# Altium PCB Arrow-ESC.PcbDoc (part 2 of 2)
Units mm, origin at the board's own origin, x right, y up, seen from the top; angles counter-clockwise.
Board outline 52 x 37.5 mm, 6 copper layers (Top Layer (SIG), Int1 (GND), Int2 (PWR), Int3 (SIG), Int4 (GND), Bottom Layer (SIG)), stack 1.546 mm thick; 104 components, 70 nets, 376 pads, 567 vias.
Unrouted connection lines stored in the file: 69.
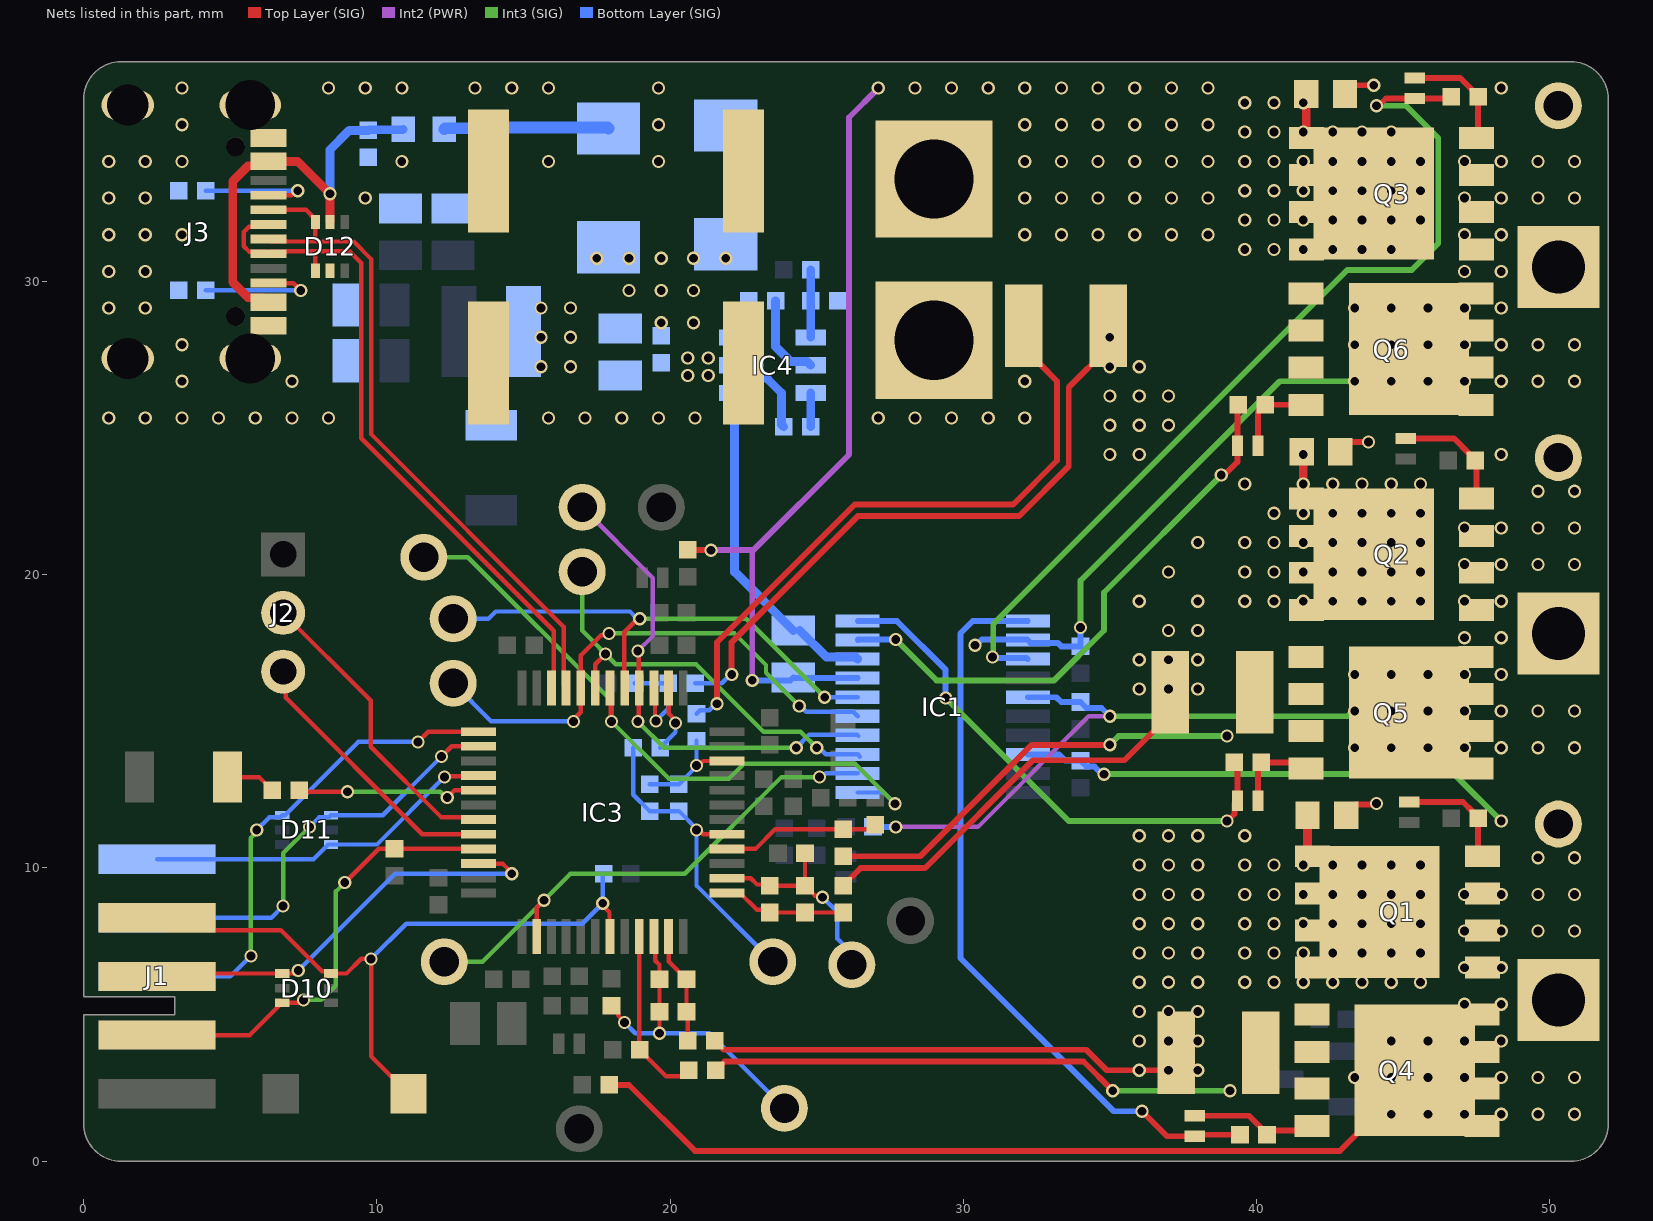
[diagram p6: the nets of this part, all layers, seen from the top]

## Via types
v1: diameter 0.45, hole 0.3, Top Layer (SIG) to Bottom Layer (SIG), tented both sides, 567 vias

## Nets (pads, with @x,y where several pads share a name; then routed paths per layer and width w, separated by ;. In a path a pad name is that pad's centre, name@x,y a point inside that pad or via, vN(x,y) a via of type N, cw(c..) or ccw(c..) an arc to the next point about the centre after c; other vN are vias at no path point) (continued)
GHC: D3.1 IC1.13 R3.1 | length 31.7
  Top Layer (SIG) w0.2: v1(44.1,36) 44.168,36 44.418,36.25 D3.1@45.4,36.25 46.59,36.25 R3.1@46.64,36.3
  Int3 (SIG) w0.2: v1(31,17.2) 31.021,17.221 31.021,18.321 43.1,30.4 45.3,30.4 46.2,31.3 46.2,34.9 45.1,36 v1(44.1,36)
  Bottom Layer (SIG) w0.2: v1(31,17.2) 31.037,17.163 32.162,17.163 IC1.13@32.2,17.125
GLA: D7.1 IC1.11 R10.1 | length 25.7
  Top Layer (SIG) w0.2: v1(36.1,1.7) 36.95,0.85 D7.1@37.9,0.85 ; D7.1@37.9,0.75 38.05,0.75 38.2,0.9 R10.1@39.44,0.9
  Bottom Layer (SIG) w0.2: IC1.11@32.2,18.425 30.325,18.425 29.9,18 29.9,6.928 35.128,1.7 v1(36.1,1.7)
GLB: D8.1 IC1.10 R11.1 | length 18.2
  Top Layer (SIG) w0.2: v1(39,11.6) 39.008,11.6 39.25,11.842 39.25,12.2 D8.1@39.35,12.3 39.35,13.49 R11.1@39.24,13.6
  Int3 (SIG) w0.2: v1(29.4,15.8) 33.6,11.6 v1(39,11.6)
  Bottom Layer (SIG) w0.2: IC1.10@26.4,18.425 27.734,18.425 29.4,16.759 v1(29.4,15.8)
GLC: D9.1 IC1.9 R12.1 | length 19.3
  Top Layer (SIG) w0.2: v1(38.8,23.4) 38.848,23.448 38.948,23.448 39.35,23.85 39.35,25.77 R12.1@39.38,25.8
  Int3 (SIG) w0.2: v1(27.694,17.794) 29.088,16.4 33.1,16.4 34.8,18.1 34.8,19.4 v1(38.8,23.4)
  Bottom Layer (SIG) w0.2: IC1.9@26.4,17.775 26.412,17.787 v1@27.688,17.787
NetC25_2: C25.2 D12.5 FB2.1 J3.A4B9 J3.B4A9 | length 14.3
  Top Layer (SIG) w0.3: J3.B4A9@6.3,29.3 6.15,29.45 5.606,29.45 5.08,29.976 5.08,33.424 5.606,33.95 6.15,33.95 J3.A4B9@6.3,34.1 7.3,34.1 v1(8.4,33) D12.5@8.4,32.034
  Bottom Layer (SIG) w0.3: v1(8.4,33) 8.4,34.5 9.06,35.16 C25.2@9.7,35.16 9.72,35.18 10.88,35.18 FB2.1@10.9,35.2
NetC27_1: C27.1 IC4.2 L1.1 | length 3.2
  Bottom Layer (SIG) w0.3: IC4.2@22.2,27.15 22.293,27.057 22.943,27.057 23.8,26.2 23.8,25.13 C27.1@23.88,25.05
  other v1: 20.6,26.8 21.3,26.8 15.6,27.1 16.6,27.1 20.6,27.4 21.3,27.4 15.6,28.1 16.6,28.1 15.6,29.1 16.6,29.1
NetC27_2: C27.2 IC4.6 | length 1.1
  Bottom Layer (SIG) w0.3: C27.2@24.8,25.05 IC4.6@24.8,26.2
NetC28_2: C28.2 C29.2 D13.1 D14.1 IC4.3 R36.2
  other v1: 19.7,28.6 20.8,28.6 18.6,29.7 19.7,29.7 20.8,29.7 17.5,30.8 18.6,30.8 19.7,30.8 20.8,30.8 21.9,30.8
NetD1_2: D1.2 Q1.4 R1.2 | length 4.1
  Top Layer (SIG) w0.2: D1.2@45.21,12.25 47.044,12.25 47.36,11.934 47.36,11.9 R1.2@47.56,11.7 47.56,10.669 47.77,10.46 47.829,10.4 Q1.4@47.71,10.4
NetD2_2: D2.2 Q2.4 R2.2 | length 4
  Top Layer (SIG) w0.2: D2.2@45.1,24.65 46.744,24.65 47.26,24.134 47.26,24.1 47.51,23.85 Q2.4@47.51,22.6
NetD3_2: D3.2 Q3.4 R3.2 | length 3.9
  Top Layer (SIG) w0.2: D3.2@45.4,36.95 46.944,36.95 47.36,36.534 47.36,36.5 R3.2@47.56,36.3 47.56,34.95 Q3.4@47.51,34.9
NetD7_2: D7.2 Q4.4 R10.2 | length 4.4
  Top Layer (SIG) w0.2: D7.2@37.9,1.55 39.744,1.55 40.16,1.134 40.16,1.1 R10.2@40.36,0.9 40.507,1.047 41.737,1.047 Q4.4@41.89,1.2
NetD8_2: D8.2 Q5.4 R11.2 | length 3
  Top Layer (SIG) w0.2: D8.2@40.05,12.3 40.05,13.49 R11.2@40.16,13.6 41.49,13.6 Q5.4@41.69,13.4
NetD9_2: D9.2 Q6.4 R12.2 | length 2.9
  Top Layer (SIG) w0.2: D9.2@40.05,24.4 40.05,25.55 R12.2@40.3,25.8 Q6.4@41.69,25.8
NetIC4_4: IC4.4 R37.1 R39.2 | length 2.3
  Bottom Layer (SIG) w0.3: IC4.4@24.8,28.1 R39.2@24.8,29.35 R37.1@24.8,30.4
NetIC4_5: IC4.5 R36.1 | length 3
  Bottom Layer (SIG) w0.3: R36.1@23.6,29.35 23.6,27.776 24.076,27.3 24.1,27.3 24.125,27.275 24.675,27.275 IC4.5@24.8,27.15
NetJ3_A5: J3.A5 R34.2 | length 4.2
  Top Layer (SIG) w0.15: J3.A5@6.3,32.95 7.074,32.95 7.224,33.1 v1(7.3,33.1)
  Bottom Layer (SIG) w0.15: R34.2@4.16,33.1 v1(7.3,33.1)
NetJ3_B5: J3.B5 R35.2 | length 4.4
  Top Layer (SIG) w0.15: J3.B5@6.3,29.95 7.145,29.95 7.395,29.7 v1(7.4,29.7)
  Bottom Layer (SIG) w0.15: R35.2@4.16,29.7 v1(7.4,29.7)
NetLED1_2: LED1.2 R28.2 | length 1.7
  Top Layer (SIG) w0.15: LED1.2@4.9,13.1 5.98,13.1 R28.2@6.43,12.65
NetQ4_1: Q4.1 Q4.2 Q4.3 R13.2 R20.1 | length 18.1
  Top Layer (SIG) w0.2: R20.1@21.56,3.1 21.86,3.4 34.1,3.4 v1(35.1,2.4)
  Int3 (SIG) w0.2: v1(35.1,2.4) v1(39.1,2.4)
NetQ5_1: Q5.1 Q5.2 Q5.3 R14.2 R25.1 | length 14.8
  Top Layer (SIG) w0.2: R25.1@25.9,10.4 28.533,10.4 32.333,14.2 v1(35,14.2)
  Int3 (SIG) w0.2: v1(35,14.2) 35.3,14.5 v1(39,14.5)
NetQ6_1: Q6.1 Q6.2 Q6.3 R13.1 R14.1 R15.2 R17.1 R23.1 R31.1 | length 52.7
  Top Layer (SIG) w0.15: R17.1@21.52,4.1 21.82,3.8
  Top Layer (SIG) w0.2: 21.82,3.8 34.195,3.8 34.895,3.1 v1(36,3.1) 36.82,3.1 37.26,3.54 R13.1@37.26,3.7 ; v1(22.1,16.6) 22.1,17.7 26.4,22 31.9,22 33.6,23.7 33.6,26.395 34.94,27.735 R15.2@34.94,28.5 ; R23.1@25.9,9.4 26.5,10 28.7,10 32.375,13.675 35.5,13.675 37,15.175 v1(37,16.1)
  Bottom Layer (SIG) w0.15: R31.1@20.86,16.3 21.764,16.3 22.064,16.6 v1(22.1,16.6)
  other v1: 37,3.1 38,3.1 36,4.1 37,4.1 38,4.1 36,5.1 37,5.1 38,5.1 36,6.1 37,6.1 38,6.1 36,7.1 37,7.1 38,7.1 36,8.1 37,8.1 38,8.1 36,9.1 37,9.1 38,9.1 36,10.1 37,10.1 38,10.1 36,11.1 37,11.1 38,11.1 36,16.1 38,16.1 36,17.1 37,17.1 38,17.1 37,18.1 38,18.1 36,19.1 38,19.1 37,20.1 38,21.1 35,24.1 36,24.1 35,25.1 36,25.1 37,25.1 35,26.1 36,26.1 37,26.1 35,27.1 36,27.1 35,28.1
NRST: C24.2 D10.6 IC3.7 J1.4 S1.2 | length 24.4
  Top Layer (SIG) w0.15: J1.4@2.5,8.3 2.925,7.875 6.725,7.875 8.125,6.475 8.359,6.475 D10.6@8.434,6.4 8.964,6.4 9.464,6.9 v1(9.8,6.9) 9.8,6.843 9.8,3.58 S1.2@11.08,2.3 ; v1(17.7,8.8) 17.7,8.719 17.932,8.487 17.932,7.68 IC3.7@17.95,7.662
  Bottom Layer (SIG) w0.15: v1(9.8,6.9) 11,8.1 17,8.1 v1(17.7,8.8) 17.7,9.76 C24.2@17.74,9.8
OPAMP1_VINM: C14.1 IC3.11 R16.2 R17.2 | length 3.8
  Top Layer (SIG) w0.15: IC3.11@19.95,7.662 19.95,6.81 C14.1@20.56,6.2 ; C14.1@20.56,6.14 R16.2@20.56,5.1 20.6,5.06 R17.2@20.6,4.1
OPAMP1_VINP: IC3.9 R20.2 R21.2 | length 5.9
  Top Layer (SIG) w0.15: IC3.9@18.95,7.662 18.95,3.81 R21.2@18.96,3.8 19.86,2.9 R20.2@20.6,2.9
OPAMP1_VOUT: C14.2 IC3.10 pad.27@23.9,1.8 R16.1 R18.1 | length 10.8
  Top Layer (SIG) w0.15: R18.1@18,5.3 18.225,5.075 18.225,4.97 18.443,4.753 v1(18.443,4.732) ; IC3.10@19.45,7.662 19.497,7.615 19.497,6.837 19.64,6.693 v1(19.64,4.36)
  Bottom Layer (SIG) w0.15: v1(18.443,4.732) 18.815,4.36 v1(19.64,4.36) 21.34,4.36 pad.27@23.9,1.8
OPAMP2_VINM: C22.1 IC3.13 R22.2 R23.2 | length 4.2
  Top Layer (SIG) w0.15: IC3.13@21.938,9.15 22.388,9.15 22.963,8.575 23.305,8.575 C22.1@23.4,8.48 R22.2@24.6,8.48 R23.2@25.9,8.48
OPAMP2_VINP: IC3.16 R25.2 R26.2 | length 5.4
  Top Layer (SIG) w0.15: IC3.16@21.938,10.65 22.912,10.65 23.582,11.32 26.84,11.32 R26.2@27,11.48
OPAMP2_VOUT: C22.2 IC3.14 pad.27@26.2,6.7 R22.1 R24.1 | length 7.3
  Top Layer (SIG) w0.15: IC3.14@21.938,9.65 22.75,9.65 22.963,9.437 23.363,9.437 C22.2@23.4,9.4 R22.1@24.6,9.4 ; R24.1@24.6,10.5 R22.1@24.6,9.4 ; v1(25.202,9.002) 25.145,9.059 24.941,9.059 R22.1@24.6,9.4
  Bottom Layer (SIG) w0.15: v1(25.202,9.002) 25.7,8.504 25.7,7.592 26.2,7.092 pad.27@26.2,6.7
OPAMP3_VINM: C23.1 IC3.22 R27.1 R29.2 | length 3.8
  Top Layer (SIG) w0.15: v1(20.9,13.5) 20.976,13.5 21.126,13.65 IC3.22@21.938,13.65
  Bottom Layer (SIG) w0.15: R27.1@19.3,12.86 C23.1@20.3,12.86 20.9,13.46 v1(20.9,13.5) R29.2@20.9,14.34
OPAMP3_VINP: IC3.27 R31.2 R32.2 | length 3.7
  Top Layer (SIG) w0.15: IC3.27@19.45,16.138 19.484,16.104 19.484,15.052 v1(19.518,15.018)
  Bottom Layer (SIG) w0.15: R32.2@18.8,16.3 19.685,16.3 R31.2@19.94,16.3 19.94,15.44 v1(19.518,15.018)
OPAMP3_VOUT: C23.2 IC3.17 pad.27@23.5,6.8 R27.2 R30.1 | length 11
  Top Layer (SIG) w0.15: v1(20.9,11.3) 20.976,11.3 21.126,11.15 IC3.17@21.938,11.15
  Bottom Layer (SIG) w0.15: R30.1@18.74,14.1 18.74,12.5 R27.2@19.3,11.94 C23.2@20.3,11.94 20.9,11.34 v1(20.9,11.3) 20.9,9.4 pad.27@23.5,6.8
PGND: C1.2 C2.2 C3.2 C4.2 C8.2 C9.2 C25.1 C26.1 C28.1 C29.1 C30.1 C31.1 C32.1 C33.1 D12.2 IC1.8 IC4.1 J3.1 J3.2 J3.3 J3.4 J3.A1B12 J3.B1A12 pad.2 R15.1 R29.1 R34.1 R35.1 R38.1 R39.1 | length 36.9
  Top Layer (SIG) w0.2: v1(21.6,15.6) 21.6,17.7 26.3,22.4 31.7,22.4 33.2,23.9 33.2,26.6 32.605,27.195 32.6,27.195 32.06,27.735 R15.1@32.06,28.5 ; C3.2@42.86,24.2 42.86,24.218 43.175,24.533 v1(43.827,24.533) ; C4.2@43.02,36.4 43.32,36.7 v1(44,36.7) ; C2.2@43.06,11.8 43.06,11.855 43.375,12.17 44.07,12.17 v1(44.1,12.2)
  Bottom Layer (SIG) w0.15: R29.1@20.9,15.26 21.024,15.384 21.337,15.384 21.554,15.6 v1(21.6,15.6)
  Bottom Layer (SIG) w0.3: IC4.1@22.2,26.2 22.2,20.1 C1.2@24.2,18.1 ; C1.2@24.425,18.1 25.325,17.2 26.325,17.2 IC1.8@26.4,17.125
  other v1: 0.85,25.35 2.1,25.35 3.35,25.35 4.6,25.35 5.85,25.35 7.1,25.35 8.35,25.35 15.85,25.35 17.1,25.35 18.35,25.35 19.6,25.35 20.85,25.35 27.1,25.35 28.35,25.35 29.6,25.35 30.85,25.35 32.1,25.35 3.35,26.6 7.1,26.6 32.1,26.6 3.35,27.85 0.85,29.1 2.1,29.1 0.85,30.35 2.1,30.35 0.85,31.6 2.1,31.6 3.35,31.6 0.85,32.85 2.1,32.85 9.6,32.85 0.85,34.1 2.1,34.1 3.35,34.1 10.85,34.1 15.85,34.1 19.6,34.1 3.35,35.35 19.6,35.35 3.35,36.6 8.35,36.6 9.6,36.6 10.85,36.6 13.35,36.6 14.6,36.6 15.85,36.6 19.6,36.6
SHA: C5.1 IC1.18 pad.1@50.3,5.5 pad.27@50.3,11.5 Q1.1 Q1.2 Q1.3 Q4.5 Q4.6 Q4.7 Q4.8 R5.2 | length 45.2
  Top Layer (SIG) w0.2: R5.2@17.92,2.6 18.6,2.6 20.85,0.35 42.85,0.35 44.1,1.6 v1(44.6,1.6)
  Int3 (SIG) w0.2: v1(34.8,13.2) 46.75,13.2 v1(48.35,11.6)
  Bottom Layer (SIG) w0.2: IC1.18@32.2,13.875 33.26,13.875 33.475,13.66 C5.1@34,13.66 34.2,13.46 34.472,13.46 34.732,13.2 v1(34.8,13.2)
  other v1: 45.85,1.6 47.1,1.6 48.35,1.6 49.6,1.6 50.85,1.6 43.35,2.85 44.6,2.85 45.85,2.85 47.1,2.85 48.35,2.85 49.6,2.85 50.85,2.85 44.6,4.1 45.85,4.1 47.1,4.1 48.35,4.1 47.1,5.35 48.35,5.35 47.1,6.6 48.35,6.6 47.1,7.85 48.35,7.85 49.6,7.85 50.85,7.85 47.1,9.1 48.35,9.1 49.6,9.1 50.85,9.1 49.6,10.35 50.85,10.35
SHB: C6.1 IC1.15 pad.1@50.3,18 pad.27@50.3,24 Q2.1 Q2.2 Q2.3 Q5.5 Q5.6 Q5.7 Q5.8 R6.2 | length 21.1
  Int2 (PWR) w0.15: v1(27.7,11.4) 30.5,11.4 34.275,15.175 v1(35,15.175)
  Int3 (SIG) w0.2: v1(35,15.175) 43.108,15.175 43.283,15.35 v1(43.35,15.35)
  Bottom Layer (SIG) w0.2: R6.2@26.92,11.4 v1(27.7,11.4) ; IC1.15@32.2,15.825 33.175,15.825 33.34,15.66 C6.1@34,15.66 34.2,15.46 34.715,15.46 v1(35,15.175)
  other v1: 43.35,14.1 44.6,14.1 45.85,14.1 47.1,14.1 48.35,14.1 49.6,14.1 50.85,14.1 44.6,15.35 45.85,15.35 47.1,15.35 48.35,15.35 49.6,15.35 50.85,15.35 43.35,16.6 44.6,16.6 45.85,16.6 47.1,16.6 48.35,16.6 47.1,17.85 48.35,17.85 47.1,19.1 48.35,19.1 47.1,20.35 48.35,20.35 49.6,20.35 50.85,20.35 47.1,21.6 48.35,21.6 49.6,21.6 50.85,21.6 49.6,22.85 50.85,22.85 48.35,24.1
SHC: C7.1 IC1.12 pad.1@50.3,30.5 pad.27@50.3,36 Q3.1 Q3.2 Q3.3 Q6.5 Q6.6 Q6.7 Q6.8 | length 18.2
  Int3 (SIG) w0.2: v1(34,18.2) 34,19.8 40.8,26.6 v1(43.35,26.6)
  Bottom Layer (SIG) w0.2: v1(30.4,17.6) 30.444,17.6 30.642,17.799 32.176,17.799 32.295,17.68 33.22,17.68 33.34,17.56 C7.1@34,17.56 v1(34,18.2)
  other v1: 44.6,26.6 45.85,26.6 47.1,26.6 48.35,26.6 49.6,26.6 50.85,26.6 43.35,27.85 44.6,27.85 45.85,27.85 47.1,27.85 48.35,27.85 49.6,27.85 50.85,27.85 43.35,29.1 44.6,29.1 45.85,29.1 47.1,29.1 48.35,29.1 47.1,30.35 48.35,30.35 47.1,31.6 48.35,31.6 47.1,32.85 48.35,32.85 49.6,32.85 50.85,32.85 47.1,34.1 48.35,34.1 49.6,34.1 50.85,34.1 48.35,36.6
STAT_LEDG: IC3.41 R28.1 | length 6.3
  Top Layer (SIG) w0.15: R28.1@7.35,12.65 7.4,12.6 v1(9,12.6) ; v1(12.4,12.4) 12.65,12.65 IC3.41@13.462,12.65
  Int3 (SIG) w0.15: v1(9,12.6) 12.162,12.6 12.362,12.4 v1(12.4,12.4)
SYS_SWCLK: D11.4 IC3.38 J1.9 | length 14.4
  Top Layer (SIG) w0.15: v1(12.2,13.8) 12.55,14.15 IC3.38@13.462,14.15
  Int3 (SIG) w0.15: v1(6.8,8.7) 6.8,10.5 v1(7.7,11.4)
  Bottom Layer (SIG) w0.15: J1.9@2.5,8.3 6.4,8.3 v1(6.8,8.7) ; v1(7.7,11.4) 8.025,11.725 8.359,11.725 D11.4@8.434,11.8 10.2,11.8 v1(12.2,13.8)
SYS_SWDIO: D11.3 IC3.37 J1.8 | length 16.8
  Top Layer (SIG) w0.15: v1(11.4,14.3) 11.75,14.65 IC3.37@13.462,14.65
  Int3 (SIG) w0.15: v1(5.7,7) 5.7,11.019 5.9,11.219 v1(5.9,11.3)
  Bottom Layer (SIG) w0.15: J1.8@2.5,6.3 5,6.3 v1(5.7,7) ; v1(5.9,11.3) 6.325,11.725 6.691,11.725 D11.3@6.766,11.8 6.862,11.8 9.362,14.3 v1(11.4,14.3)
SYS_SWO: D11.6 IC3.40 J1.10 | length 12.1
  Top Layer (SIG) w0.15: v1(12.3,13.1) 12.325,13.125 13.437,13.125 IC3.40@13.462,13.15
  Bottom Layer (SIG) w0.15: J1.10@2.5,10.3 7.838,10.3 8.338,10.8 D11.6@8.434,10.8 10,10.8 v1(12.3,13.1)
TIM1_BKIN: IC3.26 R30.2 | length 2.4
  Top Layer (SIG) w0.15: IC3.26@19.95,16.138 19.95,15.265 20.185,15.03 v1(20.185,14.949)
  Bottom Layer (SIG) w0.15: R30.2@19.66,14.1 20.185,14.625 v1(20.185,14.949)
TIM1_CH1: IC1.1 IC3.30 pad.27@11.6,20.6 | length 23
  Top Layer (SIG) w0.15: IC3.30@17.95,16.138 17.975,16.113 17.975,15.025 v1(18,15)
  Int3 (SIG) w0.15: pad.27@11.6,20.6 13.1,20.6 18,15.7 v1(18,15) 19.95,13.05 22.009,13.05 22.509,13.55 26.314,13.55 v1(27.675,12.189)
  Bottom Layer (SIG) w0.15: IC1.1@26.4,12.575 27.289,12.575 v1(27.675,12.189)
TIM1_CH1N: IC1.2 IC3.2 pad.27@12.3,6.8 | length 18.1
  Top Layer (SIG) w0.15: IC3.2@15.45,7.662 15.45,8.65 v1(15.7,8.9)
  Int3 (SIG) w0.15: pad.27@12.3,6.8 13.6,6.8 v1(15.7,8.9) 16.6,9.8 20.5,9.8 23.8,13.1 v1(25.1,13.1)
  Bottom Layer (SIG) w0.15: v1(25.1,13.1) 25.181,13.1 25.306,13.225 IC1.2@26.4,13.225
TIM1_CH2: IC1.3 IC3.31 pad.27@17,20.1 | length 14.6
  Top Layer (SIG) w0.15: IC3.31@17.45,16.138 17.45,16.95 v1(17.8,17.3)
  Int3 (SIG) w0.15: pad.27@17,20.1 17,18.1 18.15,16.95 20.886,16.95 23.194,14.642 24.458,14.642 v1(25,14.1)
  Bottom Layer (SIG) w0.15: v1(25,14.1) 25.081,14.1 25.306,13.875 IC1.3@26.4,13.875 IC1.3@26.475,13.8
TIM1_CH2N: IC1.4 IC3.28 pad.27@17,22.3 | length 16.7
  Top Layer (SIG) w0.15: v1(18.9,15) 18.925,15.025 18.925,16.113 IC3.28@18.95,16.138 18.925,16.163 18.925,17.375 v1(18.9,17.4)
  Int2 (PWR) w0.15: pad.27@17,22.3 19.415,19.885 19.415,17.915 v1(18.9,17.4)
  Int3 (SIG) w0.15: v1(18.9,15) 19.8,14.1 v1(24.3,14.1)
  Bottom Layer (SIG) w0.15: v1(24.3,14.1) 24.75,14.55 26.375,14.55 IC1.4@26.425,14.5
TIM1_CH3: IC1.5 IC3.32 pad.27@12.6,16.3 | length 18.1
  Top Layer (SIG) w0.15: v1(16.7,15) 16.7,15.063 16.95,15.313 IC3.32@16.95,16.138 16.95,17.25 17.643,17.943 17.861,17.943 v1(17.919,18)
  Int3 (SIG) w0.15: v1(17.919,18) 22.195,18 23.27,16.925 23.27,16.657 v1(24.402,15.525)
  Bottom Layer (SIG) w0.15: pad.27@12.6,16.3 13.9,15 v1(16.7,15) ; v1(24.402,15.525) 24.44,15.525 24.64,15.325 26.25,15.325 IC1.5@26.4,15.175
TIM1_CH3N: IC1.6 IC3.29 pad.27@12.6,18.5 | length 17.7
  Top Layer (SIG) w0.15: IC3.29@18.44,16.148 18.44,18.04 18.9,18.5 v1(18.965,18.5)
  Int3 (SIG) w0.15: v1@19,18.5 22.597,18.5 v1(25.272,15.825)
  Bottom Layer (SIG) w0.15: pad.27@12.6,18.5 13.803,18.5 14.053,18.75 18.634,18.75 18.884,18.5 v1(18.965,18.5) ; v1(25.272,15.825) IC1.6@26.4,15.825
USART1_RX: IC3.44 J2.3 | length 9.4
  Top Layer (SIG) w0.15: J2.3@6.8,16.7 6.887,16.613 6.887,15.813 11.55,11.15 IC3.44@13.462,11.15
USART1_TX: IC3.43 J2.2 | length 10.5
  Top Layer (SIG) w0.15: J2.2@6.8,18.7 9.789,15.711 9.789,14.136 12.199,11.725 13.387,11.725 IC3.43@13.462,11.65
USART3_RX: D10.3 IC3.45 J1.2 R33.2 | length 15.5
  Top Layer (SIG) w0.15: J1.2@2.5,4.3 5.666,4.3 D10.3@6.766,5.4 7.319,5.4 7.419,5.5 v1(7.5,5.5) ; v1(8.9,9.5) 10.06,10.66 IC3.45@13.452,10.66
  Int3 (SIG) w0.15: v1(7.5,5.5) 8.1,5.5 8.6,6 8.6,9.2 v1(8.9,9.5)
USART3_TX: D10.1 IC3.46 J1.3 | length 14.9
  Top Layer (SIG) w0.15: J1.3@2.5,6.3 2.6,6.4 D10.1@6.766,6.4 7.219,6.4 v1(7.319,6.5) ; IC3.46@13.462,10.15 14.287,10.15 14.6,9.837 v1(14.6,9.8)
  Bottom Layer (SIG) w0.15: v1(7.319,6.5) 10.619,9.8 v1(14.6,9.8)
USB_D_N: D12.6 IC3.33 J3.A7 J3.B7 | length 23.7
  Top Layer (SIG) w0.15: J3.A7@6.3,31.45 6.375,31.375 6.925,31.375 6.933,31.368 7.812,31.368 ; J3.B7@6.3,32.45 6.35,32.45 6.4,32.5 6.45,32.45 7.58,32.45 7.9,32.13 D12.6@7.9,32.034 7.9,31.455 7.812,31.368 ; IC3.33@16.45,16.138 16.375,16.213 16.375,16.743 16.368,16.751 16.368,18.232 9.8,24.8 9.8,30.774 9.206,31.368 7.812,31.368
USB_D_P: D12.1 IC3.34 J3.A6 J3.B6 | length 23.7
  Top Layer (SIG) w0.15: J3.A6@6.3,31.95 6.225,31.875 5.637,31.875 5.455,31.693 5.455,31.207 5.637,31.025 6.225,31.025 J3.B6@6.3,30.95 6.375,31.025 6.925,31.025 6.933,31.033 7.812,31.033 ; D12.1@7.9,30.366 7.9,30.945 7.812,31.033 ; IC3.34@15.95,16.138 16.025,16.213 16.025,16.743 16.033,16.751 16.033,18.094 9.465,24.661 9.465,30.635 9.068,31.033 7.812,31.033
VBATT: C1.1 C2.1 C3.1 C4.1 C8.1 C9.1 D13.2 IC1.7 pad.1@29,33.5 Q1.5 Q1.6 Q1.7 Q1.8 Q2.5 Q2.6 Q2.7 Q2.8 Q3.5 Q3.6 Q3.7 Q3.8 R4.2 | length 32.3
  Top Layer (SIG) w0.15: R4.2@20.6,20.86 R4.2@20.62,20.84
  Top Layer (SIG) w0.2: R4.2@20.62,20.84 v1(21.4,20.84)
  Top Layer (SIG) w0.3: C3.1@41.6,24 41.6,22.71 Q2.5@41.71,22.6 ; C4.1@41.7,36.4 41.7,34.91 Q3.5@41.71,34.9 ; C2.1@41.74,11.8 41.74,10.57 Q1.5@41.91,10.4
  Int2 (PWR) w0.2: v1(21.4,20.84) 22.84,20.84 ; v1(22.8,16.4) 22.8,20.8 26.1,24.1 26.1,35.6 v1(27.1,36.6)
  Bottom Layer (SIG) w0.2: v1(22.8,16.4) 24.1,16.4 C1.1@24.2,16.5 ; C1.1@24.225,16.475 IC1.7@26.4,16.475
  other v1: 39.6,6.1 40.6,6.1 41.6,6.1 42.6,6.1 43.6,6.1 44.6,6.1 45.6,6.1 39.6,7.1 40.6,7.1 41.6,7.1 42.6,7.1 43.6,7.1 44.6,7.1 45.6,7.1 39.6,8.1 40.6,8.1 41.6,8.1 42.6,8.1 43.6,8.1 44.6,8.1 45.6,8.1 39.6,9.1 40.6,9.1 41.6,9.1 42.6,9.1 43.6,9.1 44.6,9.1 45.6,9.1 39.6,10.1 40.6,10.1 41.6,10.1 42.6,10.1 43.6,10.1 44.6,10.1 45.6,10.1 39.6,11.1 39.6,19.1 40.6,19.1 41.6,19.1 42.6,19.1 43.6,19.1 44.6,19.1 45.6,19.1 39.6,20.1 40.6,20.1 41.6,20.1 42.6,20.1 43.6,20.1 44.6,20.1 45.6,20.1 39.6,21.1 40.6,21.1 41.6,21.1 42.6,21.1 43.6,21.1 44.6,21.1 45.6,21.1 40.6,22.1 41.6,22.1 42.6,22.1 43.6,22.1 44.6,22.1 45.6,22.1 39.6,23.1 41.6,23.1 42.6,23.1 43.6,23.1 44.6,23.1 45.6,23.1 41.6,24.1 39.6,31.1 40.6,31.1 41.6,31.1 42.6,31.1 43.6,31.1 44.6,31.1 32.1,31.6 33.35,31.6 34.6,31.6 35.85,31.6 37.1,31.6 38.35,31.6 39.6,32.1 40.6,32.1 41.6,32.1 42.6,32.1 43.6,32.1 44.6,32.1 45.6,32.1 32.1,32.85 33.35,32.85 34.6,32.85 35.85,32.85 37.1,32.85 38.35,32.85 39.6,33.1 40.6,33.1 41.6,33.1 42.6,33.1 43.6,33.1 44.6,33.1 45.6,33.1 32.1,34.1 33.35,34.1 34.6,34.1 35.85,34.1 37.1,34.1 38.35,34.1 39.6,34.1 40.6,34.1 41.6,34.1 42.6,34.1 43.6,34.1 44.6,34.1 45.6,34.1 39.6,35.1 40.6,35.1 41.6,35.1 42.6,35.1 43.6,35.1 44.6,35.1 32.1,35.35 33.35,35.35 34.6,35.35 35.85,35.35 37.1,35.35 38.35,35.35 39.6,36.1 40.6,36.1 41.6,36.1 28.35,36.6 29.6,36.6 30.85,36.6 32.1,36.6 33.35,36.6 34.6,36.6 35.85,36.6 37.1,36.6 38.35,36.6
VBUS_USB: C26.2 D14.2 FB2.2 | length 5.6
  Bottom Layer (SIG) w0.4: FB2.2@12.3,35.2 12.33,35.23 13.47,35.23 C26.2@13.5,35.26 17.865,35.26 D14.2@17.9,35.225
pads on no net: D10.4 D11.1 D12.3 D12.4 IC3.3 IC3.4 IC3.6 IC3.39 IC3.42 J1.6 J1.7 J3.A8 J3.B8 J3.Un1 J3.Un2

## Polygon pours and split planes (outlines as drawn)
DGND on Top Layer (SIG) "NONET_L-01_P-001" (solid, pour order 100): 35.5,0 1.27,0 cw(c1.27,1.27) 0,1.27 0,24 33.5,24 35.5,22
VBATT on Top Layer (SIG) "NONET_L-01_P-001" (solid, pour order 41): 46.5,25 46.5,18 38.5,18 38.5,25
VBATT on Top Layer (SIG) "NONET_L-01_P-001" (solid, pour order 38): 46.4,5.5 46.4,12.5 38.5,12.5 38.5,5.5
SHB on Top Layer (SIG) "NONET_L-01_P-001" (solid, pour order 14): 52,12.5 42.7,12.5 42.7,18 46.5,18 46.5,25 52,25
NetQ6_1 on Top Layer (SIG) "Top Layer (SIG)-NetQ6_1" (solid, pour order 4): 35.5,0 38.5,0 38.5,26.3 42.7,26.3 42.7,30.5 33.5,30.5 33.5,24 35.5,22
VBATT on Top Layer (SIG) "NONET_L-01_P-001" (solid, pour order 0): 46.5,30.5 46.5,37.5 12,37.5 12,30.5
PGND on Top Layer (SIG) "NONET_L-01_P-001" (solid, pour order 5): 33.5,30.5 33.5,24 0,24 0,36.23 cw(c1.27,36.23) 1.27,37.5 12,37.5 12,30.5
SHA on Top Layer (SIG) "NONET_L-01_P-001" (solid, pour order 9): 42.7,0 50.73,0 ccw(c50.73,1.27) 52,1.27 52,12.5 46.4,12.5 46.4,5.5 42.7,5.5
NetQ4_1 on Top Layer (SIG) "NONET_L-01_P-001" (solid, pour order 12): 42.7,5.5 38.5,5.5 38.5,2 38.6,1.9 42.7,1.9
SHC on Top Layer (SIG) "Top Layer (SIG)-SHC" (solid, pour order 15): 42.7,25 52,25 52,36.23 ccw(c50.73,36.23) 50.73,37.5 46.5,37.5 46.5,30.5 42.7,30.5
NetQ5_1 on Top Layer (SIG) "NONET_L-01_P-001" (solid, pour order 18): 42.7,18 38.5,18 38.5,14.2 42.7,14.2
DGND on Int1 (GND) "NONET_L-01_P-001" (solid, pour order 104): 35.5,0 1.27,0 cw(c1.27,1.27) 0,1.27 0,24 33.5,24 35.5,22
PGND on Int1 (GND) "Int1 (GND)-PGND" (solid, pour order 73): 0,24 33.5,24 35.5,22 35.5,0 42.7,0 42.7,5.5 46.4,5.5 46.4,12.5 42.7,12.5 42.7,18 46.5,18 46.5,25 42.7,25 42.7,30.5 46.5,30.5 46.5,37.5 1.27,37.5 ccw(c1.27,36.23) 0,36.23
SHA on Int1 (GND) "NONET_L-01_P-001" (solid, pour order 29): 42.7,0 50.73,0 ccw(c50.73,1.27) 52,1.27 52,12.5 46.4,12.5 46.4,5.5 42.7,5.5
SHC on Int1 (GND) "Top Layer (SIG)-SHC" (solid, pour order 40): 42.7,25 52,25 52,36.23 ccw(c50.73,36.23) 50.73,37.5 46.5,37.5 46.5,30.5 42.7,30.5
SHB on Int1 (GND) "NONET_L-01_P-001" (solid, pour order 37): 52,12.5 42.7,12.5 42.7,18 46.5,18 46.5,25 52,25
+3V3 on Int2 (PWR) "Int2 (PWR)-+3V3" (solid, pour order 30): 0,1.27 ccw(c1.27,1.27) 1.27,0 35.5,0 35.5,22 33.5,24 13.9,24 13.9,31.7 9.8,31.7 9.8,24 0,24
PGND on Int2 (PWR) "NONET_L-01_P-001" (solid, pour order 99): 33.5,30.5 33.5,24 0,24 0,36.23 cw(c1.27,36.23) 1.27,37.5 26,37.5 26,30.5
VBATT on Int2 (PWR) "Int2 (PWR)-VBATT" (solid, pour order 94): 26,30.5 33.5,30.5 38.5,25.5 38.5,0 42.7,0 42.7,5.5 46.4,5.5 46.4,12.5 42.7,12.5 42.7,18 46.5,18 46.5,25 42.7,25 42.7,30.5 46.5,30.5 46.5,37.5 26,37.5
NetQ6_1 on Int2 (PWR) "Int2 (PWR)-NetQ6_1" (solid, pour order 57): 35.5,0 38.5,0 38.5,25.5 33.5,30.5 33.5,24 35.5,22
NetC27_1 on Int2 (PWR) "Int2 (PWR)-NetC27_1" (solid, pour order 97): 21.7,26.5 21.7,27.8 19.1,27.8 17.5,29.4 16.7,30.2 13.9,30.2 13.9,26.5
NetC28_2 on Int2 (PWR) "Int2 (PWR)-NetC28_2" (solid, pour order 36): 19.1,27.8 23.1,27.8 23.1,32.2 16.7,32.2 16.7,30.2 17.5,29.4
SHA on Int2 (PWR) "NONET_L-01_P-001" (solid, pour order 58): 42.7,0 50.73,0 ccw(c50.73,1.27) 52,1.27 52,12.5 46.4,12.5 46.4,5.5 42.7,5.5
SHC on Int2 (PWR) "Top Layer (SIG)-SHC" (solid, pour order 87): 42.7,25 52,25 52,36.23 ccw(c50.73,36.23) 50.73,37.5 46.5,37.5 46.5,30.5 42.7,30.5
SHB on Int2 (PWR) "NONET_L-01_P-001" (solid, pour order 85): 52,12.5 42.7,12.5 42.7,18 46.5,18 46.5,25 52,25
DGND on Int3 (SIG) "NONET_L-01_P-001" (solid, pour order 103): 35.5,0 1.27,0 cw(c1.27,1.27) 0,1.27 0,24 33.5,24 35.5,22
PGND on Int3 (SIG) "Int3 (SIG)-PGND" (solid, pour order 96): 33.5,24 35.5,22 35.5,0 42.7,0 42.7,5.5 46.4,5.5 46.4,12.5 42.7,12.5 42.7,18 46.5,18 46.5,25 42.7,25 42.7,30.5 26,30.5 26,37.5 1.27,37.5 ccw(c1.27,36.23) 0,36.23 0,24
SHB on Int3 (SIG) "NONET_L-01_P-001" (solid, pour order 31): 52,12.5 42.7,12.5 42.7,18 46.5,18 46.5,25 52,25
NetC27_1 on Int3 (SIG) "Int3 (SIG)-NetC27_1" (solid, pour order 89): 21.7,26.5 21.7,27.8 19.1,27.8 17.5,29.4 16.7,30.2 13.9,30.2 13.9,26.5
NetC28_2 on Int3 (SIG) "Int3 (SIG)-NetC28_2" (solid, pour order 88): 19.1,27.8 23.1,27.8 23.1,32.2 16.7,32.2 16.7,30.2 17.5,29.4
VBATT on Int3 (SIG) "NONET_L-01_P-001" (solid, pour order 64): 46.5,30.5 46.5,37.5 26,37.5 26,30.5
SHC on Int3 (SIG) "Top Layer (SIG)-SHC" (solid, pour order 68): 42.7,25 52,25 52,36.23 ccw(c50.73,36.23) 50.73,37.5 46.5,37.5 46.5,30.5 42.7,30.5
SHA on Int3 (SIG) "NONET_L-01_P-001" (solid, pour order 44): 42.7,0 50.73,0 ccw(c50.73,1.27) 52,1.27 52,12.5 46.4,12.5 46.4,5.5 42.7,5.5
DGND on Int4 (GND) "NONET_L-01_P-001" (solid, pour order 102): 35.5,0 1.27,0 cw(c1.27,1.27) 0,1.27 0,24 33.5,24 35.5,22
PGND on Int4 (GND) "Int4 (GND)-PGND" (solid, pour order 74): 0,24 33.5,24 35.5,22 35.5,0 42.7,0 42.7,5.5 46.4,5.5 46.4,12.5 42.7,12.5 42.7,18 46.5,18 46.5,25 42.7,25 42.7,30.5 46.5,30.5 46.5,37.5 1.27,37.5 ccw(c1.27,36.23) 0,36.23
SHA on Int4 (GND) "NONET_L-01_P-001" (solid, pour order 27): 42.7,0 50.73,0 ccw(c50.73,1.27) 52,1.27 52,12.5 46.4,12.5 46.4,5.5 42.7,5.5
SHC on Int4 (GND) "Top Layer (SIG)-SHC" (solid, pour order 43): 42.7,25 52,25 52,36.23 ccw(c50.73,36.23) 50.73,37.5 46.5,37.5 46.5,30.5 42.7,30.5
SHB on Int4 (GND) "NONET_L-01_P-001" (solid, pour order 32): 52,12.5 42.7,12.5 42.7,18 46.5,18 46.5,25 52,25
DGND on Bottom Layer (SIG) "NONET_L-01_P-001" (solid, pour order 101): 35.5,0 1.27,0 cw(c1.27,1.27) 0,1.27 0,24 33.5,24 35.5,22
VBATT on Bottom Layer (SIG) "Bottom Layer (SIG)-VBATT" (solid, pour order 92): 27,30.5 33.5,30.5 38.5,25.5 38.5,0 42.7,0 42.7,5.5 46.4,5.5 46.4,12.5 42.7,12.5 42.7,18 46.5,18 46.5,25 42.7,25 42.7,30.5 46.5,30.5 46.5,37.5 20.5,37.5 20.5,34 23.5,34
NetQ6_1 on Bottom Layer (SIG) "Bottom Layer (SIG)-NetQ6_1" (solid, pour order 52): 35.5,0 38.5,0 38.5,25.5 33.5,30.5 33.5,24 35.5,22
SHA on Bottom Layer (SIG) "NONET_L-01_P-001" (solid, pour order 78): 42.7,0 50.73,0 ccw(c50.73,1.27) 52,1.27 52,12.5 46.4,12.5 46.4,5.5 42.7,5.5
PGND on Bottom Layer (SIG) "NONET_L-01_P-001" (solid, pour order 93): 33.5,24 0,24 0,36.23 cw(c1.27,36.23) 1.27,37.5 20.5,37.5 20.5,34 23.5,34 27,30.5 33.5,30.5
NetC27_1 on Bottom Layer (SIG) "NONET_L-01_P-001" (solid, pour order 75): 16.7,30.2 13.9,30.2 13.9,26.5 17.5,26.5 17.5,29.4
+3V3 on Bottom Layer (SIG) "NONET_L-01_P-001" (solid, pour order 45): 13.9,26.5 9.8,26.5 9.8,31.7 13.9,31.7
NetC27_1 on Bottom Layer (SIG) "NONET_L-01_P-001" (solid, pour order 76): 22.7,27.7 22.7,26.5 20.3,26.5 20.3,27.7
NetC28_2 on Bottom Layer (SIG) "Bottom Layer (SIG)-NetC28_2" (solid, pour order 56): 17.5,27.8 23.1,27.8 23.1,32.2 16.7,32.2 16.7,30.2 17.5,29.4
SHB on Bottom Layer (SIG) "NONET_L-01_P-001" (solid, pour order 79): 52,12.5 42.7,12.5 42.7,18 46.5,18 46.5,25 52,25
SHC on Bottom Layer (SIG) "Top Layer (SIG)-SHC" (solid, pour order 90): 42.7,25 52,25 52,36.23 ccw(c50.73,36.23) 50.73,37.5 46.5,37.5 46.5,30.5 42.7,30.5

## Silkscreen, mask and mechanical layers (free items; w line width, h text height)
Top Overlay:
  text "C" at 50.001,34.182 h1
  text "CH2N" at 15.801,23.482 h1
  text "B" at 50.039,22.082 h1
  text "V-Bus" at 20.9,21.987 h1
  text "CH1" at 10.801,21.882 h1
  text "CH2" at 14.101,20.782 h1
  text "GND" at 8.001,20.382 h1
  text "CH3N" at 13.601,18.982 h1
  text "TX" at 8.001,18.382 h1
  text "RX" at 8,16.282 h1
  text "CH3" at 10.101,14.982 h1
  text "A" at 49.981,9.582 h1
  text "V-B" at 29.5,7.882 h1
  text "CH1N" at 11.018,5.601 h1 r90
  text "I-Bus" at 23.101,5.087 h1
  text "I-B" at 26.801,5.082 h1
  text "I-A" at 25.201,1.382 h1
  text "V-A" at 18.1,0.682 h1
Mechanical 13:
  lines w0.2: 0,5 0,1.27 ccw(c1.27,1.27) 1.27,0 50.73,0 ccw(c50.73,1.27) 52,1.27 52,33.73 52,36.23 ccw(c50.73,36.23) 50.73,37.5 1.27,37.5 ccw(c1.27,36.23) 0,36.23 0,33.73 0,5.6